# Altium PCB 发送端V04.PcbDoc
Units mm, origin at the board's own origin, x right, y up, seen from the top; angles counter-clockwise.
Board outline 114.55 x 90.3 mm, 2 copper layers (Top Layer, Bottom Layer); 72 components, 37 nets, 403 pads, 42 vias.
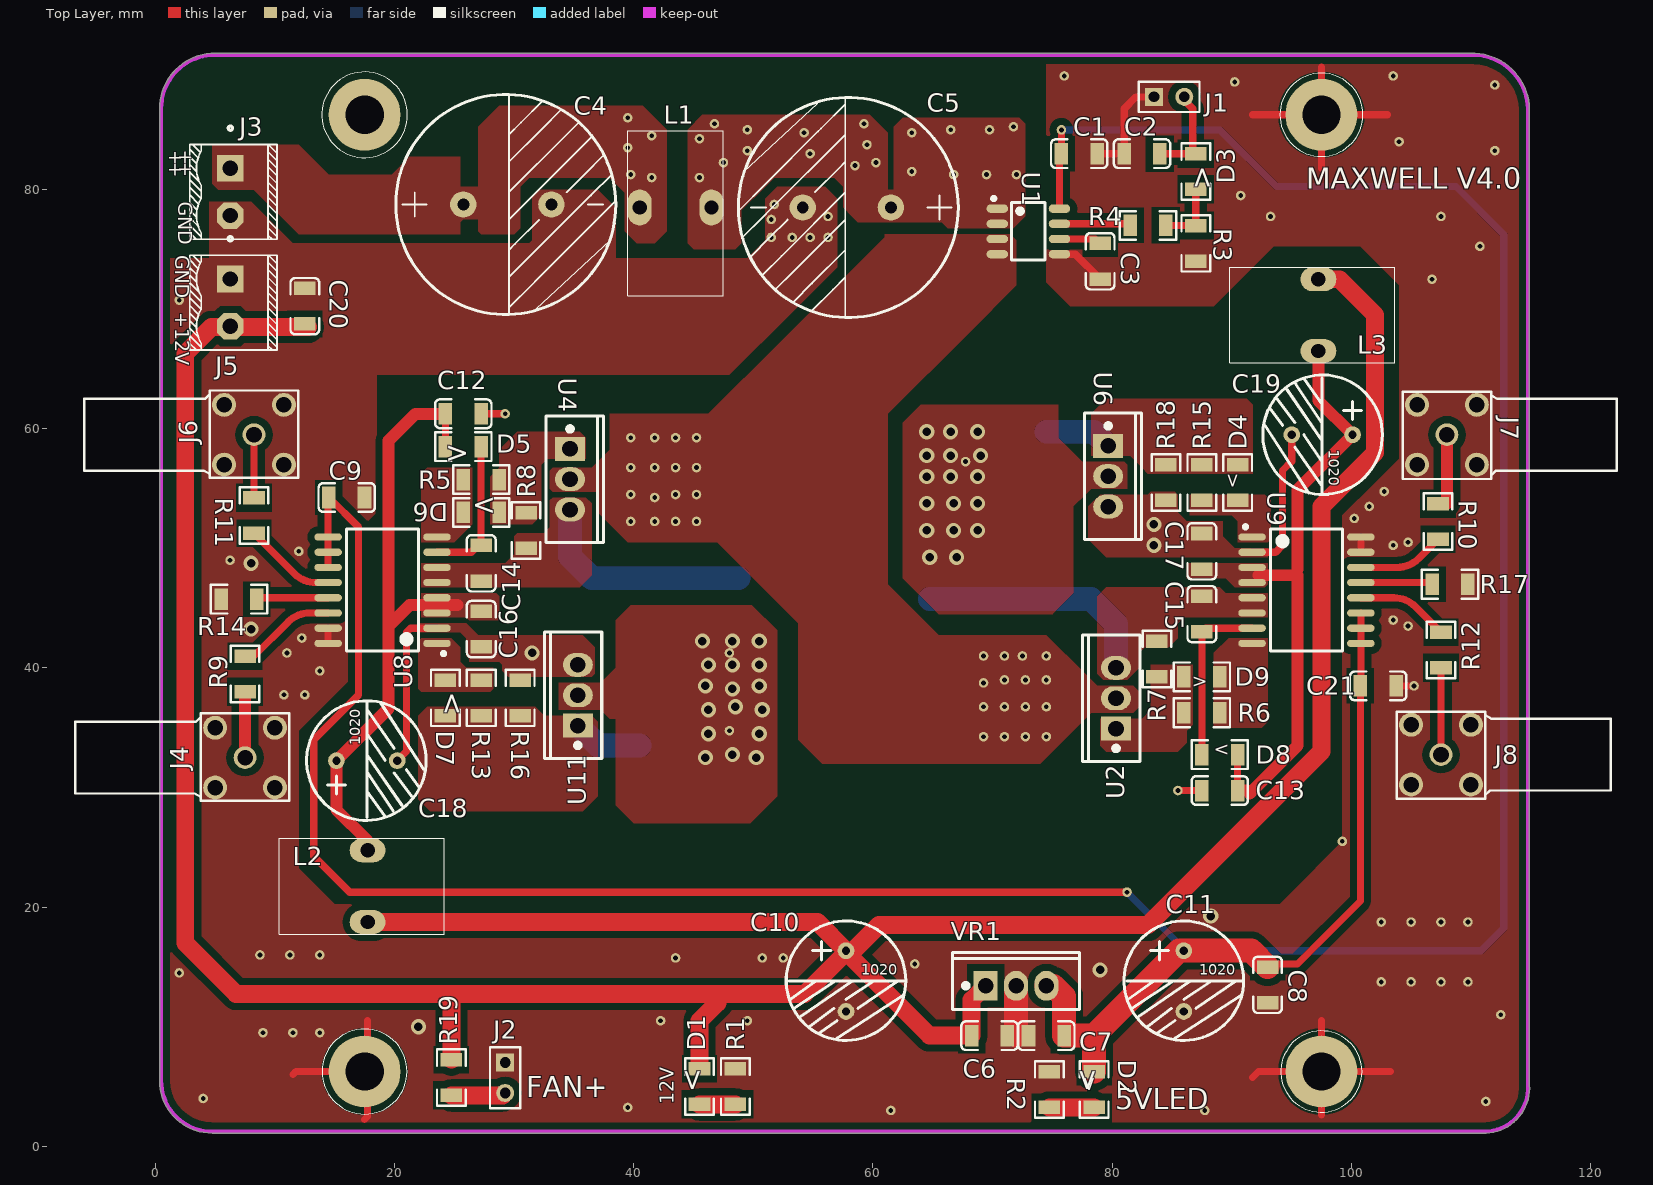
[diagram p0: Top Layer view]
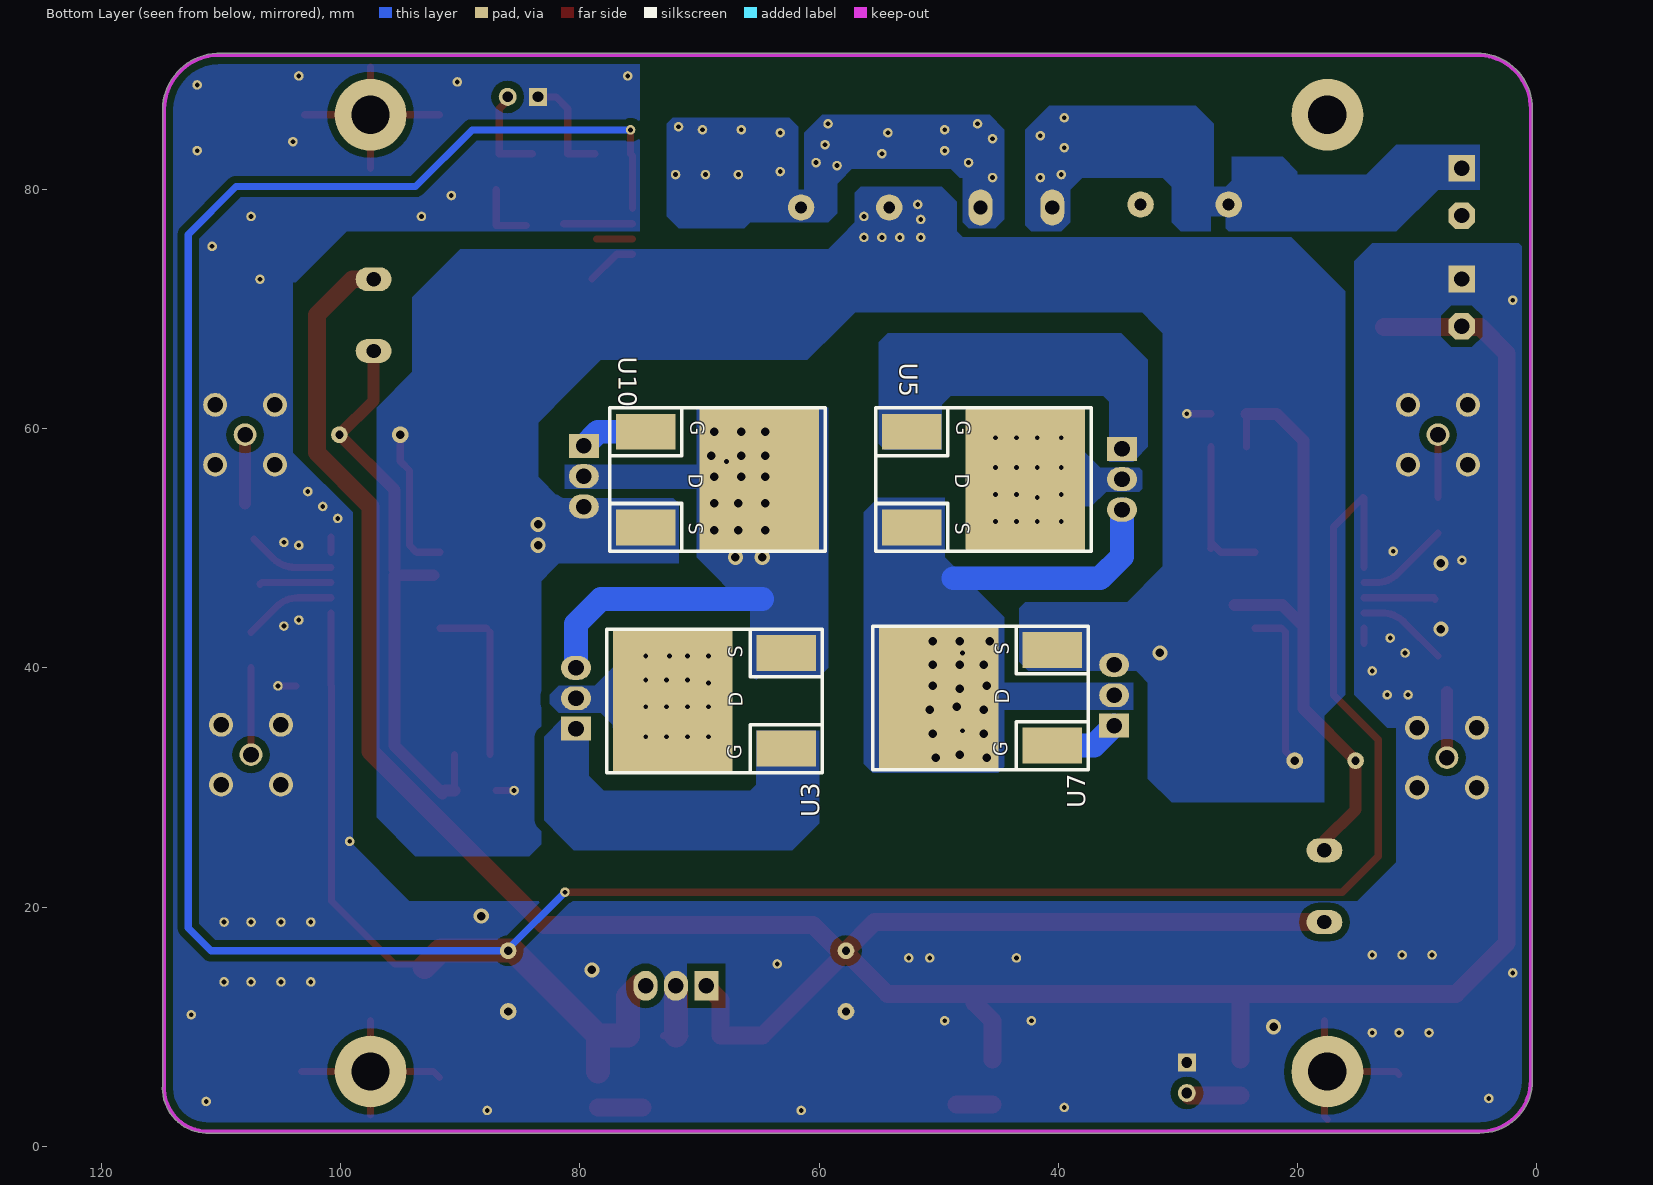
[diagram p1: Bottom Layer view, seen from below]
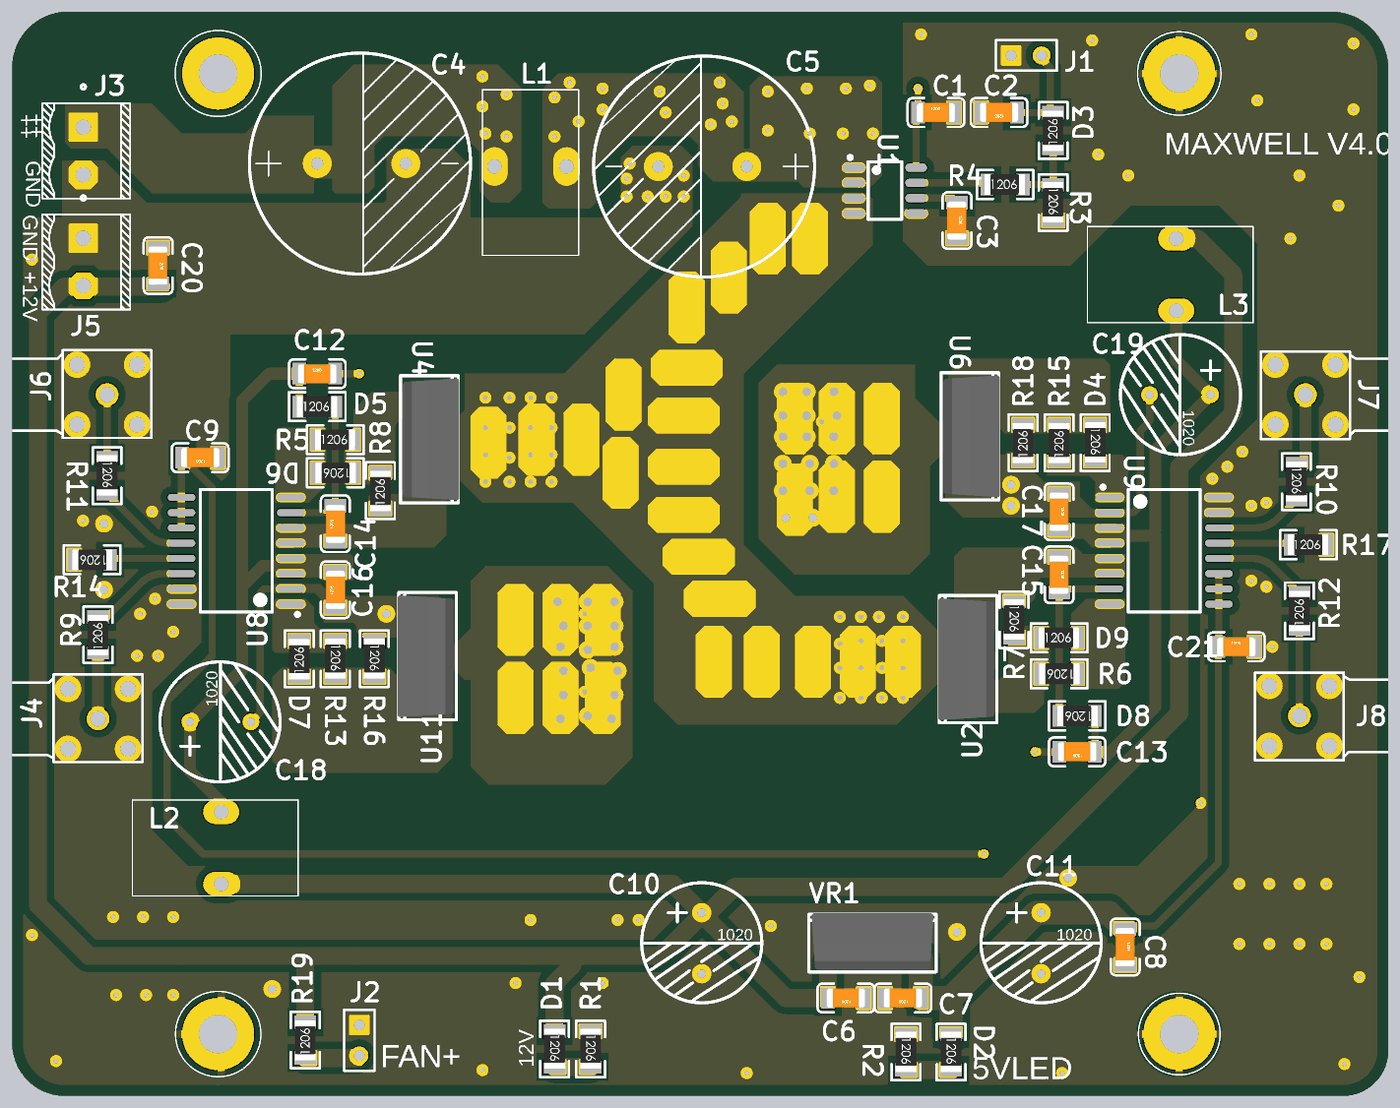
[diagram p2: 3D render of the assembled board from above, using the file's embedded part models]

## Layer stack, top to bottom
Top Solder: solder mask 0.0102, Solder Resist, Dk 3.5
Top Layer: signal copper 0.0356
Dielectric1: dielectric 0.32, FR-4, Dk 4.8
Bottom Layer: signal copper 0.0356
Bottom Solder: solder mask 0.0102, Solder Resist, Dk 3.5

## Board outline
0.35,5.5 ccw(c4.75,5.5) 4.75,1.1 111.25,1.1 ccw(c111.25,1.25) 111.255,1.1 ccw(c111.125,4.875) 114.903,4.875 ccw(c111.125,4.875) 114.9,5.003 114.9,87 ccw(c114.75,87) 114.881,87.074 ccw(c110.125,86.625) 109.998,91.4 5,91.4 ccw(c5,86.75) 0.35,86.75

## Design rules (kind name [scope] priority, off if disabled: settings)
Clearance [All] p1: gap=0.3
ComponentClearance [All] p1: gap=0 collisioncheckmode=3 verticalgap=0 showdistances=FALSE
HoleSize [All] p1 off: absolutevalues=TRUE maxlimit=2.54 minlimit=0.3 maxpercent=80.000 minpercent=20.000
HoleToHoleClearance [All] p1 off: gap=0.254 allowstackedmicrovias=TRUE
LayerPairs [All] p1 off: enforce=TRUE
MinimumSolderMaskSliver [All] p1 off: minsoldermaskwidth=0.254
NetAntennae [All] p1 off: netantennaetolerance=0
PolygonConnect [All] p1: connectstyle=Direct reliefconductorwidth=0.6 reliefentries=4 polygonreliefangle="45 Angle" airgapwidth=0.254
RoutingVias [All] p1: holewidth=0.4 width=0.6 viastyle="Through Hole" minholewidth=0.3 minwidth=0.5 maxholewidth=20 maxwidth=30
SilkToSilkClearance [All] p1 off: silktosilkclearance=0.254
SilkToSolderMaskClearance SilkscreenOverComponentPads [IsPad] p1 off: minsilkscreentomaskgap=0.254 clearancetoexposedcopper=TRUE
SolderMaskExpansion [All] p1: expansion=0.102
Width [All] p1: maxlimit=20 minlimit=0.6 preferedwidth=1
22 further rules are at their usual default settings.

## Components (designator, comment, footprint, x,y, rotation, side; value= is the part's Value field where it differs from the comment)
C1 "01.uF" 1206_C 77.25,83 r0 top
C2 "1nF" 1206_C 82.5,83 r180 top
C3 "1nF" 1206_C 79,74 r270 top
C4 "47uF/160V" C3618 25.75,78.75 r0 top
C5 "47uF/160V" C3618 61.5,78.5 r180 top
C6 "47UF/50" 1206_C 69.75,9.25 r180 top
C7 "10UF/50v" 1206_C 74.5,9.25 r180 top
C8 "10UF/50v" 1206_C 93,13.5 r270 top
C9 "10UF/50v" 1206_C 16,54.25 r180 top
C10 "47UF/50" C1020 57.75,11.25 r90 top
C11 "47UF/50" C1020 86,11.25 r90 top
C12 "10UF" 1206_C 25.75,61.25 r0 top
C13 "10UF" 1206_C 89,29.75 r180 top
C14 "2.2nF" 1206_C 27.25,48.75 r90 top
C15 "2.2nF" 1206_C 87.5,44.5 r270 top
C16 "2.2nF" 1206_C 27.25,43.25 r90 top
C17 "2.2nF" 1206_C 87.5,49.75 r270 top
C18 "47UF/50" C1020 20.25,32.25 r180 top
C19 "47UF/50" C1020 95,59.5 r0 top
C20 "47UF/50" 1206_C 12.5,70.25 r270 top
C21 "10UF/50v" 1206_C 102.25,38.5 r0 top
D1 "LED3" 1206_R 45.5,5 r270 top
D2 "LED3" 1206_R 78.5,4.75 r270 top
D3 "1N5819" 1206_R 87,81.5 r90 top
D4 "1N5819" 1206_R 90.5,55.5 r270 top
D5 "1N5819" 1206_R 25.75,58.5 r0 top
D6 "1N5819" 1206_R 27.25,53 r180 top
D7 "1N5819" 1206_R 24.25,37.5 r90 top
D8 "1N5819" 1206_R 89,32.75 r180 top
D9 "1N5819" 1206_R 87.5,39.25 r0 top
J1 "CON-2" HDR1X2 83.5,87.75 r0 top
J2 "CON-2" HDR1X2 29.25,7 r270 top
J3 "CON-2" F396P2-1 6.5,80 r90 top
J4 "CON-2" GPSPIN 10,30 r180 top
J5 "CON-2" F396P2-1 6.5,70.75 r90 top
J6 "CON-2" GPSPIN 10.75,57 r180 top
J7 "CON-2" GPSPIN 105.5,62 r0 top
J8 "CON-2" GPSPIN 105,35.25 r0 top
L1 "330mH" H3.3 40.5,78.5 r0 top
L2 "330mH" H3.3 17.75,24.75 r270 top
L3 "330mH" H3.3 97.25,72.5 r270 top
R1 "5K" 1206_R 48.5,5 r270 top
R2 "1K" 1206_R 74.75,4.75 r270 top
R3 "10K" 1206_R 87,75.5 r270 top
R4 "2K" 1206_R 83,77 r0 top
R5 "5R" 1206_R 27.25,55.75 r0 top
R6 "5R" 1206_R 87.5,36.25 r180 top
R7 "10K" 1206_R 83.75,40.75 r270 top
R8 "10K" 1206_R 31,51.5 r90 top
R9 "30R" 1206_R 7.5,39.5 r90 top
R10 "30R" 1206_R 107.25,52.25 r270 top
R11 "30R" 1206_R 8.25,52.75 r270 top
R12 "30R" 1206_R 107.5,41.5 r90 top
R13 "5R" 1206_R 27.25,37.5 r270 top
R14 "1K" 1206_R 7,45.75 r180 top
R15 "5R" 1206_R 87.5,55.5 r90 top
R16 "10K" 1206_R 30.5,37.5 r270 top
R17 "1K" 1206_R 108.25,47 r0 top
R18 "10K" 1206_R 84.5,55.5 r90 top
R19 "1K" 1206_R 24.75,5.75 r90 top
U1 "ACS712" SOIC-8_150mil 73,76.5 r270 top
U2 "IKW50N60H3" TO-220 80.25,35 r90 top
U3 "IKW50N60H3" DDPak 72.25,37.25 r90 bottom
U4 "IKW50N60H3" TO-220 34.75,58.25 r270 top
U5 "IKW50N60H3" DDPak 42.75,55.75 r270 bottom
U6 "IRFP4868" TO-220 79.75,58.5 r270 top
U7 "IRFP4868" DDPak 50,37.5 r90 bottom
U8 "IR2110" SOIC-16_300mil 19,46.5 r90 top
U9 "IR2110" SOIC-16_300mil 96.25,46.5 r270 top
U10 "IRFP4868" DDPak 65,55.75 r270 bottom
U11 "IRFP4868" TO-220 35.25,35.25 r90 top
VR1 "L78M05ABDT-TR" TO-220 69.5,13.5 r0 top

## Footprints (in the part's own frame and the unit in brackets; to place one, negate y for a bottom-side part, rotate by r counter-clockwise, add the part's x,y. Pads: shape width x height; smd on the part's side, far side on the other; paste and mask are expansions set on the pad)
1206_C [mm]
  rect 1.13x1.8 smd: 1(-1.49,0) 2(1.49,0)
  silkscreen extent -2.36,-1.2 2.35,1.2, body extent -1.6,-0.81 1.6,0.79, height 1
1206_R [mm]
  rect 1.13x1.8 smd: 1(-1.49,0) 2(1.49,0)
  silkscreen extent -2.36,-1.2 2.35,1.2, body extent -1.7,-0.86 1.65,0.87, height 0.85
C1020 [mm] "1000UF/25V\\470UF/16V"
  round 1.4 hole 0.7: 1(5.106,-0.001) 2(0.026,-0.001)
  silkscreen extent -2.4,-5 7.6,5
C3618 [mm]
  round 2.2 hole 1: 1(0,0) 2(7.366,0)
  silkscreen extent -5.64,-9.2 12.76,9.2
DDPak [mm]
  rect 12x10 smd: D(0,0)
  rect 3x5 smd: G(-4,-9.5) S(4,-9.5)
  silkscreen extent -6,-12.5 6,5.5
F396P2-1 [mil]
  rect 88x88 hole 50: 1(70,9)
  oct 88x88 hole 50: 2(-85.91,9)
  silkscreen extent -164,-145 209,143, body extent -167,-148 151,146, height 559
GPSPIN [mm]
  round 1.9 hole 1.3: 1(2.5,-2.5)
  round 2 hole 1.3: 2(0,0) 2(0,-5) 2(5,0) 2(5,-5)
  silkscreen extent -1.2,-6.2 16.7,1.1
H3.3 [mm]
  oval 2x3 hole 1.2: 1(0,0) 2(6,0)
  silkscreen extent -1,-7.4 7,6.4
HDR1X2 [mm]
  rect 1.5x1.5 hole 0.9: 1(0,0)
  round 1.5 hole 0.9: 2(2.54,0)
  silkscreen extent -1.27,-1.27 3.81,1.27
SOIC-8_150mil [mm]
  oval 0.7x1.8 smd: 1(-1.905,-2.6) 2(-0.635,-2.6) 3(0.635,-2.6) 4(1.905,-2.6) 5(1.905,2.6) 6(0.635,2.6) 7(-0.635,2.6) 8(-1.905,2.6)
  silkscreen extent -2.9,-3.05 2.4,1.4
SOIC-16_300mil [mm]
  oval 0.6x2.3 smd: 1(-4.445,-4.55) 2(-3.175,-4.55) 3(-1.905,-4.55) 4(-0.635,-4.55) 5(0.635,-4.55) 6(1.905,-4.55) 7(3.175,-4.55) 8(4.445,-4.55) 9(4.445,4.55) 10(3.175,4.55) 11(1.905,4.55) 12(0.635,4.55) 13(-0.635,4.55) 14(-1.905,4.55) 15(-3.175,4.55) 16(-4.445,4.55)
  silkscreen extent -5.45,-5.25 5.1,3
TO-220 [mm]
  oval 2x2.5 hole 1.3: D(2.468,-0.077) S(5.008,-0.077)
  rect 2x2.5 hole 1.3: G(-0.072,-0.077)
  silkscreen extent -2.83,-2.08 7.77,2.72, body extent -2.6,-1.88 7.54,2.82, height 19.37

## Part data
C1 C2 C3 C4 C5 C6 C7 C8 C9 C10 C11 C12 C13 C14 C15 C16 C17 C18 C19 C20 C21: library part CAP
D1 D2: "Typical BLUE SiC LED"
D3 D4 D5 D6 D7 D8 D9: library part 1N4148, "1N4148WS IN4148 0805 SOD323 丝印T4 贴片开"
L1 L2 L3: library part INL, "CD75--2.2mH 222M 贴片功率电感绕线功率电感 7*7.8*5mm"
R1 R2 R3 R4 R5 R6 R7 R8 R9 R10 R11 R12 R13 R14 R15 R16 R17 R18 R19: library part RES
U1: library part 6N137S(TA)_[C16496], "贴片?"
U2 U3 U4 U5 U6 U7 U10 U11: library part NMOS
VR1: library part "TO-252-2 L78M05ABDT-TR", "低压差线性稳?"

## Free pads (board coordinates)
  round 6 hole 3.2: 1(17.5,86.25) 2(97.5,86.25) 3(97.5,6.25) 4(17.5,6.25)
  round 0.8 hole 0.4: 5(48,41.25) 6(48,34.75) 7(67.75,57.25) 8(29.25,61.25) 9(85.5,29.75) 11(105.25,38.5) 12(81.25,21.25) 13(75.76,84.99) 14(51.75,78.75) 15(51.5,77.5) 16(51.5,76) 17(53.25,76) 18(54.75,76) 19(56.25,76) 20(56.25,77.75) 21(102.5,18.75) 22(105,18.75) 23(107.5,18.75) 24(109.75,18.75) 25(102.5,13.75) 26(105,13.75) 27(107.5,13.75) 28(109.75,13.75) 29(8.75,16) 30(11.25,16) 31(13.75,16) 32(9,9.5) 33(11.5,9.5) 34(13.75,9.5) 35(52.5,15.75) 36(50.75,15.75) 37(43.5,15.75) 38(42.25,10.5) 39(49.5,10.5) 40(63.5,15.25) 41(2,70.75) 42(10.75,37.75) 43(12.5,37.75) 44(103.5,44) 45(101.5,53.5) 46(102.75,54.75) 47(100.25,52.5) 48(104.75,50.5) 49(104.75,43.5) 50(103.5,50.25) 51(12.25,42.5) 52(12,49.75) 53(11,41.25) 54(6.25,49) 55(13.75,39.75) 56(99.25,25.5) 57(4,4) 58(111.25,3.75) 59(61.5,3) 60(87.75,3) 61(39.5,3.25) 62(2,14.5) 63(112.5,11) 64(112,88.75) 65(76,89.5) 66(112,83.25) 67(103.5,89.5) 68(93.25,77.75) 69(107.5,77.75) 70(110.75,75.25) 71(106.75,72.5) 72(90.75,79.5) 73(104,84) 74(90.25,89) 75(45.5,81) 76(45.5,84.25) 77(46.75,85.5) 78(59.25,85.5) 79(63.25,81.5) 80(63.25,84.75) 81(71.75,85.25) 82(72,81.25) 83(69.5,81.25) 84(66.75,81.25) 85(66.5,85) 86(69.75,85) 87(58.5,82) 88(47.5,82.25) 89(49.5,85) 90(49.5,83.25) 91(54.25,84.75) 92(54.75,83) 93(59.5,83.75) 94(60.25,82.25) 95(39.75,81.25) 96(41.5,81) 97(41.5,84.5) 98(39.5,86) 99(39.5,83.5) 178(69.25,41) 179(71,41) 180(72.5,41) 181(74.5,41) 182(69.25,38.75) 183(71,39) 184(72.75,39) 185(74.5,39) 186(69.25,36.75) 187(71,36.75) 188(72.75,36.75) 189(74.5,36.75) 190(69.25,34.25) 191(71,34.25) 192(72.75,34.25) 193(74.5,34.25) 194(39.75,59.25) 195(41.75,59.25) 196(43.5,59.25) 197(45.25,59.25) 198(39.75,56.75) 199(41.75,56.75) 200(43.5,56.75) 201(45.25,56.75) 202(39.75,54.5) 203(41.75,54.25) 204(43.5,54.5) 205(45.25,54.5) 206(39.75,52.25) 207(41.75,52.25) 208(43.5,52.25) 209(45.25,52.25)
  oct 3x6 on Top Solder: 100(42.25,40.75) 101(46,40.75) 102(42.25,34.25) 103(46,34.25) 104(65.5,57.5) 105(69,57.5) 106(72.75,57.5) 107(65.5,50.75) 108(69,51) 109(72.75,51) 110(49.5,40.75) 111(49.5,34.25) 112(74.5,37.25) 113(70.75,37.25) 114(67,37.25) 115(62.75,37.25) 116(58.75,37.25) 123(40,55.5) 124(44,55.75) 125(47.75,55.75) 126(51.25,59.5) 127(51,53) 131(66.75,72.5) 132(63.25,72.5) 133(60,69.25) 134(56.5,66.75)
  oct 6x3 on Top Solder: 117(59.25,42.5) 118(57.5,46) 119(56.25,49.5) 120(56.25,53.5) 121(56.25,57.75) 122(56.5,61.75)
  oct 3x6 on Bottom Solder: 136(49.5,73) 137(45.5,72.75) 138(41.75,72.75) 139(37.75,72.75) 140(34,73) 141(30.5,72.5) 143(29.5,43.25) 144(26,43.25) 145(21.25,43.25) 146(21.25,50.25) 147(21.5,57.5) 148(21.5,64.5) 149(21.75,72) 150(26.5,72) 151(26.25,64.25) 152(26.25,57.5) 153(26.25,50.25) 155(54,73) 163(82.5,67.5) 164(86.5,67) 166(90.75,67.25) 167(86.5,59.75) 168(91,59.75) 169(86.5,52.25) 170(91.5,52.25) 171(87,44.75) 172(91.75,44.75) 173(87,37.5) 174(91.75,37.75) 176(21,36.5) 177(26,36.5)
  oct 6x3 on Bottom Solder: 142(34.25,43.25) 154(81.25,50.5) 156(59.75,73) 157(63,69.25) 158(67.25,73) 159(70,69.25) 160(74.5,73) 161(77.25,69.25) 162(82.25,73) 165(88.5,72.5) 175(89.25,32)

## Via types
v1: diameter 1.27, hole 0.711, Top Layer to Bottom Layer, 42 vias

## Nets (pads, with @x,y where several pads share a name; then routed paths per layer and width w, separated by ;. In a path a pad name is that pad's centre, name@x,y a point inside that pad or via, vN(x,y) a via of type N, cw(c..) or ccw(c..) an arc to the next point about the centre after c; other vN are vias at no path point)
5V: C1.1 C7.1 C8.1 C9.2 C11.1 C21.1 D2.1 pad.12 pad.13 U1.8 U8.9 U8.10 U8.11 U9.9 U9.10 U9.11 VR1.S | length 309.8
  Top Layer w0.6: U8.11 U8.10 U8.9 C9.2@14.45,54.19 ; C9.2 17,51.76 17,37.75 13.25,34 13.25,24.25 16.25,21.25 pad.12 ; U1.8 C1.1@75.6,82.84 ; C1.1 pad.13 ; C8.1 93.26,15.25 95.5,15.25 100.76,20.51 C21.1 100.8,38.54 U9.9 U9.10 U9.11
  Top Layer w2: VR1.S 75.077,13.423 75.99,12.51 C7.1 78.5,9.25 ; D2.1 78.5,9.25 ; C8.1 91.634,16.356 C11.1 85.606,16.356 78.5,9.25
  Bottom Layer w0.6: pad.13 89.01,84.99 93.75,80.25 108.75,80.25 112.75,76.25 112.75,18.25 110.856,16.356 C11.1 86.001,16.499 pad.12
12V: C6.2 C10.1 C20.2 D1.1 J5.2 L2.2 L3.1 R19.2 VR1.G | length 280
  Top Layer w1.5: C20.2@12.75,68.5 4.703,68.5 2.5,66.297 2.5,17 6.75,12.75 54.296,12.75 57.902,16.356 57.902,16.098 64.75,9.25 C6.2 68.26,12.255 VR1.G ; L2.2@17.5,18.75 55.357,18.75 C10.1 ; R19.2 24.75,12.5 ; 45.5,7.24 45.5,10.5 47,12 ; C10.1@58,16 60.5,18.5 83,18.5 97.5,33 97.5,53.5 102,58 102,69.5 99,72.5 L3.1
48V: C4.1 J3.1 L1.1 pad.95 pad.96 pad.97 pad.98 pad.99
GND2: C1.2 C2.2 C3.2 C4.2 C5.2 C6.1 C7.2 C8.2 C9.1 C10.2 C11.2 C12.2 C13.2 C16.1 C17.1 C18.2 C19.2 C20.1 C21.2 J1.1 J2.1 J3.2 J4.2 J5.1 J6.2 J7.2 J8.2 pad.2 pad.3 pad.4 pad.8 pad.9 pad.11 pad.14 pad.15 pad.16 pad.17 pad.18 pad.19 pad.20 pad.21 pad.22 pad.23 pad.24 pad.25 pad.26 pad.27 pad.28 pad.29 pad.30 pad.31 pad.32 pad.33 pad.34 pad.35 pad.36 pad.37 pad.38 pad.39 pad.40 pad.41 pad.42 pad.43 pad.44 pad.45 pad.46 pad.47 pad.48 pad.49 pad.50 pad.51 pad.52 pad.53 pad.54 pad.55 pad.56 pad.57 pad.58 pad.59 pad.60 pad.61 pad.62 pad.63 pad.64 pad.65 pad.66 pad.67 pad.68 pad.69 pad.70 pad.71 pad.72 pad.73 pad.74 R1.1 R2.1 R3.2 R14.2 R16.1 R17.2 R18.1 U1.5 U6.S U7.S U8.2 U8.15 U8.16 U9.2 U9.15 U9.16 U10.S U11.S VR1.D | length 106.8
  Top Layer w0.6: 11.5,6 11.75,6.25 pad.4 pad.4@17.75,6.25 ; U8.16 U8.15 ; 17.5,2.25 17.75,2.5 pad.4@17.75,6.25 ; 17.75,10.5 pad.4@17.75,6.25 ; C18.2 21,33.027 21,43 21.325,43.325 U8.2 ; C12.2 pad.8 ; C6.1 C7.2 ; U1.5 76.915,74.595 C3.2 ; C1.2 C2.2 81.01,86.76 82,87.75 J1.1 ; pad.9 C13.2@87.01,29.75 ; U9.2 93.675,49.675 94.25,50.25 94.25,56.5 95.026,57.276 C19.2 ; 91.75,5.75 92.25,6.25 pad.3 ; 91.75,86.25 pad.2 ; 97.5,2.639 pad.3 ; 97.5,10.5 pad.3 ; 97.5,81.75 pad.2 ; 97.5,90.25 pad.2 ; U9.15 U9.16 ; 103,86.25 pad.2 ; 103.25,6.25 pad.3 ; C21.2 pad.11
  Top Layer w2: 71.968,9.25 VR1.D
  other v1: 22,10 79,14.75 88.25,19.25 31.5,41.25 8,43.25 8,48.75 83.5,50.25 83.5,52
NetC2_1: C2.1 D3.2 J1.2 | length 7.8
  Top Layer w0.6: C2.1 84,82.99 86.75,82.99 86.75,86.75 86.04,87.46 J1.2
NetC3_1: C3.1 U1.6 | length 3
  Top Layer w0.6: U1.6 C3.1@78.625,75.865
NetC5_1: C5.1 L1.2 pad.75 pad.76 pad.77 pad.78 pad.79 pad.80 pad.81 pad.82 pad.83 pad.84 pad.85 pad.86 pad.87 pad.88 pad.89 pad.90 pad.91 pad.92 pad.93 pad.94 U1.1 U1.2
NetC12_1: C12.1 C16.2 C18.1 D5.1 L2.1 U8.3 U8.4 | length 52.3
  Top Layer w0.6: D5.1 C12.1
  Top Layer w1: L2.1@17.75,24.5 17.75,25.55 15.144,28.156 C18.1 19.5,36.607 19.5,43.5 ; C12.1 21.75,61.25 19.5,59 19.5,43.5 ; 25.25,45.25 21.25,45.25 19.5,43.5
NetC13_1: C13.1 C17.2 C19.1 D8.1 L3.2 U9.3 U9.4 | length 48.4
  Top Layer w0.6: D8.1 90.49,30.02 C13.1@90.76,29.75
  Top Layer w1: C13.1 91.25,29.75 ; 91.5,29.5 95.5,33.5 95.5,47.75 92.25,47.75 ; 95.5,48.25 95.5,54.893 C19.1 97.25,62.355 L3.2
NetC14_1: C14.1 pad.5 pad.6 R8.1 U4.S U5.S U7.D U8.5 U8.6 U11.D | length 18.7
  Bottom Layer w2: U4.S 34.673,49.327 36.5,47.5 48.75,47.5
  other v1: 46,32.5 50.25,32.5 48.25,32.75 46.25,34.5 50.5,34.5 46.25,36.5 50.75,36.5 48.5,36.75 48.25,38.25 46,38.5 50.5,38.5 46.25,40.25 48.25,40.25 50.5,40.25 45.75,42.25 48.25,42.25 50.5,42.25
NetC14_2: C14.2 D5.2 U8.7 | length 12.5
  Top Layer w0.6: U8.7 26.415,49.675 C14.2@27.24,50.5 ; D5.2 C14.2@27.24,50.5 ; C14.2@27.25,49.99 27.24,50 C14.2@27.24,50.5
NetC15_1: C15.1 pad.7 R7.1 U2.S U3.S U6.D U9.5 U9.6 U10.D | length 20.1
  Bottom Layer w2: 64.75,45.75 78.25,45.75 80.327,43.673 U2.S
  other v1: 64.75,49.25 67,49.25 64.5,51.5 66.75,51.5 68.75,51.5 64.5,53.75 66.75,53.75 68.75,53.75 64.5,56 66.5,56 68.75,56 64.5,57.75 66.5,57.75 69,57.75 64.5,59.75 66.5,59.75 68.75,59.75
NetC15_2: C15.2 D8.2 U9.7 | length 14.1
  Top Layer w0.6: D8.2 C15.2@87.51,43 ; C15.2@87.815,43.325 U9.7
NetD1_2: D1.2 R1.2 | length 3
  Top Layer w1.5: D1.2 R1.2
NetD2_2: D2.2 R2.2 | length 3.8
  Top Layer w1.5: R2.2 D2.2
NetD3_1: D3.1 R3.1 R4.2 | length 5.5
  Top Layer w0.6: R4.2 86.99,77 R3.1 D3.1
NetD4_1: D4.1 R15.2 R18.2 U6.G U10.G | length 5.7
  Bottom Layer w2: U10.G 78.495,59.75 U6.G
NetD4_2: D4.2 R15.1 U9.1
NetD6_1: D6.1 R5.2 R8.2 U4.G U5.G
NetD6_2: D6.2 R5.1 U8.8
NetD7_1: D7.1 R13.2 R16.2 U7.G U11.G | length 5.9
  Bottom Layer w2: U11.G 37.005,33.5 U7.G
NetD7_2: D7.2 R13.1 U8.1
NetD9_1: D9.1 R6.2 R7.2 U2.G U3.G
NetD9_2: D9.2 R6.1 U9.8
NetJ2_2: J2.2 R19.1 | length 4.3
  Top Layer w1.5: R19.1 J2.2@29.05,4.26
NetJ4_1: J4.1 R9.1 | length 5.5
  Top Layer w1: J4.1 R9.1
NetJ6_1: J6.1 R11.1 | length 5.3
  Top Layer w0.6: R11.1 J6.1
NetJ7_1: J7.1 R10.1 | length 5.8
  Top Layer w1: R10.1@108,53.75 J7.1
NetJ8_1: J8.1 R12.1 | length 7.3
  Top Layer w0.6: J8.1 R12.1
NetR4_1: R4.1 U1.7 | length 5.8
  Top Layer w0.6: U1.7 R4.1@81.375,77.135
NetR9_2: R9.2 U8.14 | length 7.6
  Top Layer w0.6: R9.2@8.25,40.99 11.111,43.851 cw(c12.907,42.055) 12.907,44.595 U8.14
NetR10_2: R10.2 U9.14 | length 7.3
  Top Layer w0.6: U9.14 103.843,48.405 ccw(c103.843,50.945) 105.639,49.149 R10.2
NetR11_2: R11.2 U8.12 | length 7.8
  Top Layer w0.6: R11.2 11.631,47.879 ccw(c13.427,49.675) 13.427,47.135 U8.12
NetR12_2: R12.2 U9.12 | length 7.8
  Top Layer w0.6: U9.12 103.573,45.865 cw(c103.573,43.325) 105.369,45.121 R12.2
NetR14_1: R14.1 U8.13 | length 6
  Top Layer w0.6: R14.1 8.605,45.865 U8.13
NetR17_1: R17.1 U9.13 | length 6
  Top Layer w0.6: U9.13 106.625,47.135 R17.1
NetU1_3: pad.178 pad.179 pad.180 pad.181 pad.182 pad.183 pad.184 pad.185 pad.186 pad.187 pad.188 pad.189 pad.190 pad.191 pad.192 pad.193 pad.194 pad.195 pad.196 pad.197 pad.198 pad.199 pad.200 pad.201 pad.202 pad.203 pad.204 pad.205 pad.206 pad.207 pad.208 pad.209 U1.3 U1.4 U2.D U3.D U4.D U5.D

## Polygon pours and split planes (outlines as drawn)
NetC14_1 on Bottom Layer "Top Layer-No Net" (solid, remove dead copper, pour order 23): 49.5,54.25 55.25,54.25 55.25,54 55.75,53.5 56.25,53 56.25,32.5 56.25,32 55.5,31.25 45.75,31.25 45,31.25 44.5,31.75 44.5,43 44.5,44.25 45,44.75 49.5,49.25 49.5,50 49.5,54.25
NetC15_1 on Bottom Layer "Top Layer-No Net" (solid, remove dead copper, pour order 25): 59.25,61.75 70.25,61.75 70.25,49.25 66,45 65.75,44.75 65.75,39.75 65.75,39.5 65.25,39 65,39.25 60.25,39.25 60,39.25 59.25,40 59.25,61.75
NetC15_1 on Bottom Layer "Top Layer-No Net" (solid, remove dead copper, pour order 27): 81.25,57 70,57 70,54.75 70.25,55 81.25,55 81.25,57
NetC14_1 on Bottom Layer "Top Layer-No Net" (solid, remove dead copper, pour order 29): 33.75,38.75 45.5,38.75 45.5,36.75 45.25,36.5 33.75,36.5 33.75,38.75
NetU1_3 on Bottom Layer "Top Layer-No Net" (solid, remove dead copper, pour order 33): 81.75,38.5 79,38.5 78.75,38.5 77.25,40 75.25,40 75.25,36 76.25,35 77.25,35 77.25,35.25 78.25,36.25 81.75,36.25 82.5,37 82.5,37.75 81.75,38.5
NetU1_3 on Bottom Layer "Top Layer-No Net" (solid, remove dead copper, pour order 35): 33,56.5 33.25,56.75 36.5,56.75 38.5,58.75 39.5,58.75 39.75,58.5 40,58.25 40,54 39.75,54 39.5,53.75 39.25,53.5 37.75,53.5 37.25,53.5 36,54.75 33.25,54.75 33,55 33,56.5
NetD9_1 on Bottom Layer "Top Layer-No Net" (solid, remove dead copper, pour order 80): 65.25,34.75 65.25,30.25 65.75,29.75 78,29.75 79.25,31 79.25,35.75 81.5,35.75 83,34.25 83,27.5 83,27.25 81.5,25.75 80.5,24.75 64.25,24.75 62.25,24.75 60.25,26.75 60,27 60,34.75 65.25,34.75
GND2 on Bottom Layer "Top Layer-No Net" (solid, remove dead copper, pour order 94): 51.75,80.25 56,80.25 56.5,80.25 56.75,80 57,79.75 57,77.5 57,77.25 58.25,76 59.25,75 79.25,75 90,75 93.25,71.75 94,71 94,65.75 94,64.75 97,61.75 97,32.75 97,27.5 93.75,24.25 84.5,24.25 84.25,24.25 83.5,25 83.25,25.25 83.25,47.25 82.25,48.25 81.75,48.75 71.75,48.75 71.75,53.75 72.25,54.25 72.5,54.5 81,54.5 82,54.5 83.25,55.75 83.5,56 83.5,60 83.5,60.5 80.75,63.25 78.25,65.75 63,65.75 61,65.75 58.25,68.5 51.75,75 51.75,75.25 51.75,80.25
NetD6_1 on Bottom Layer "Top Layer-No Net" (solid, remove dead copper, pour order 98): 35.75,57.25 33.75,57.25 33.5,57.5 32.5,58.5 32.5,61.75 32.5,65.75 34.5,67.75 34.75,68 53.75,68 54.25,68 55,67.25 55,58.75 54.5,58.25 49.75,58.25 49.75,62 49,62.75 36.75,62.75 36.25,62.75 35.75,62.25 35.75,57.25
GND2 on Bottom Layer "Top Layer-No Net" (solid, remove dead copper, pour order 100): 56.5,80.25 50.75,80.25 49.75,80.25 48.5,79 48.5,76.5 48,76 34,76 20.5,76 16.25,71.75 16,71.5 16,66.75 16,37.75 17,36.75 17.75,36 17.75,28.75 30.5,28.75 32.5,30.75 32.5,38.5 32.5,38.75 33.25,39.5 33.5,39.75 42.25,39.75 42.5,39.75 43.25,40.5 43.25,45 42.75,45.5 34.25,45.5 31.5,48.25 31.25,48.5 31.25,67.75 31.25,68 32,68.75 33,69.75 57,69.75 57,72.75 57.25,73 57,73.25 57,79.75 56.5,80.25
GND2 on Bottom Layer "Top Layer-No Net" (solid, remove dead copper, pour order 114): 0.5,74.5 1.5,75.5 13.5,75.5 13.75,75.5 15,74.25 15.25,74 15.25,58.75 15.25,37.75 12.5,35 11.75,35 11.75,23.75 12.5,23 15,20.5 94,20.5 94.25,20.5 99.25,25.5 99,25.75 99,52.75 99,53 103.75,57.75 104,58 104,72.25 103.75,72.25 99.75,76.25 99.5,76.5 75,76.5 75,91.25 114.75,91.25 114.75,1.5 115,1.25 0.5,1.25 0.5,74.5
48V on Bottom Layer "Top Layer-No Net" (solid, remove dead copper, pour order 116): 4.75,80.5 4.75,83.75 11.75,83.75 14.25,81.25 20,81.25 20,81.5 21.25,82.75 25.5,82.75 25.5,80.75 25.75,80.5 26,80.25 27,80.25 27,85.5 28.5,87 28.75,87 40.75,87 42.75,85 42.75,77 42.25,76.5 40,76.5 39.75,76.5 39.5,76.75 39,77.25 39,80 38,81 31.25,81 30.5,80.25 30.5,77.25 29.75,76.5 27.25,76.5 27.25,77.75 26,77.75 26,76.75 25.75,76.5 12.25,76.5 11.75,76.5 8.25,80 4.75,80 4.75,80.5
NetC5_1 on Bottom Layer "Top Layer-No Net" (solid, remove dead copper, pour order 118): 46.5,76.75 47.5,76.75 47.75,77 48,77.25 48,81 48.25,81 48.75,81.5 49,81.75 57,81.75 57.25,81.75 58.25,80.75 58.5,80.5 58.5,78.25 58.5,78 59.25,77.25 65.75,77.25 66.25,76.75 71.75,76.75 72.75,77.75 72.75,85.5 72.25,86 62.5,86 61.75,85.25 61.75,80 61.25,80 61.25,84.75 59.75,86.25 45.75,86.25 44.5,85 44.5,77.5 45.25,76.75 46.5,76.75
NetU1_3 on Top Layer "Top Layer-No Net" (solid, remove dead copper, pour order 31): 69,76.25 71.25,76.25 71.5,76.25 72,75.75 72,72 68,68 61.25,61.25 61.25,49.25 61.25,47 65.25,43 65.5,42.75 74.5,42.75 77.75,39.5 78.75,38.5 81.5,38.5 81.75,38.5 82,38.25 82.25,38 82.25,37.25 82.25,36.75 82,36.5 81.75,36.25 78.75,36.25 78.25,36.25 75.25,33.25 74,32 56,32 55.75,32 54.75,33 53.75,34 53.75,43.75 47,50.5 39.5,50.5 37.75,52.25 37,53 37,54.75 33.25,54.75 33,55 33,56.25 33,56.5 33.25,56.75 36.5,56.75 38,58.25 38,61.25 46.25,61.25 52.25,67.25 61,76 61,76.25 71.5,76.25
NetC15_1 on Top Layer "Top Layer-No Net" (solid, remove dead copper, pour order 41): 81.25,57 81,57.25 77.75,57.25 77.5,57.25 76.25,58.5 75.5,59.25 75.5,62 64,62 62.5,60.5 62.5,47.5 65.5,44.5 75.037,44.5 75.037,44.537 76.5,46 76.75,46.25 76.75,53.25 76.75,53.5 77.75,54.5 78.25,55 81.25,55 81.25,57
NetC14_1 on Top Layer "Top Layer-No Net" (solid, remove dead copper, pour order 43): 33.75,38.75 37.25,38.75 38.25,39.75 38.5,40 38.5,43 38.5,44 39.5,45 39.75,45.25 49.31,45.25 49.885,45.25 52,43.135 52,29.5 52,29.25 49.75,27 41.25,27 40,27 38.75,28.25 38.5,28.5 38.5,35.75 38,35.75 37.25,36.5 33.75,36.5 33.75,38.75
NetD6_2 on Top Layer "Top Layer-No Net" (solid, remove dead copper, pour order 45): 22.25,50.5 24.5,50.5 25,50.5 26.25,51.75 26.5,52 26.5,56.75 22.75,56.75 22.25,56.25 22.25,50.5
NetD6_1 on Top Layer "Top Layer-No Net" (solid, remove dead copper, pour order 47): 28,52 31.5,52 32,52.5 32.25,52.75 32.25,57 32.75,57.5 36,57.5 36,59.25 35.5,59.75 30.5,59.75 30.25,59.75 29,58.5 28.75,58.25 28.75,57 28.75,56.75 28.25,56.25 28,56 28,52
NetC14_1 on Top Layer "Top Layer-No Net" (solid, remove dead copper, pour order 49): 22.25,48.75 29.25,48.75 30,49.5 30,51 30.25,51.25 32.5,51.25 33,51.75 33,54 33.25,54.25 35.75,54.25 36,54.25 36.5,53.75 36.5,48 36.5,47.75 35.5,46.75 22.25,46.75 22.25,48.75
NetD7_2 on Top Layer "Top Layer-No Net" (solid, remove dead copper, pour order 51): 22.25,42.5 24.75,42.5 25.25,42 25.5,41.75 25.5,40.5 26,40 28.25,40 28.25,38.25 28,38 22.5,38 22.25,38 22,38.25 22,42.25 22.25,42.5
GND2 on Top Layer "Top Layer-No Net" (solid, remove dead copper, pour order 55): 22.25,43.75 25,43.75 26,43.75 26.25,43.5 27,42.75 28.25,42.75 35.75,42.75 36.75,41.75 36.75,39.5 36.5,39.25 32.75,39.25 29.5,39.25 29,39.75 29,40.25 28.75,40.5 26.25,40.5 26.25,40.75 26,41 26,42 26,42.5 25.5,43 22,43 22,43.75 22.25,43.75
NetC12_1 on Top Layer "Top Layer-No Net" (solid, remove dead copper, pour order 57): 22.25,46.25 28.5,46.25 28.75,46 28.75,45.5 28.75,44 26.25,44 26,44.25 22.25,44.25 22.25,46.25
NetD9_1 on Top Layer "Top Layer-No Net" (solid, remove dead copper, pour order 59): 86.75,40.25 83.25,40.25 83.25,36.5 82.5,35.75 79,35.75 79,33.5 79.5,33 85.5,33 85.75,33.25 86.25,33.75 86.25,34.5 86.25,34.75 86.75,35.25 86.75,40.25
NetC15_1 on Top Layer "Top Layer-No Net" (solid, remove dead copper, pour order 61): 93,44.25 93,46.25 90.25,46.25 89.5,46.25 89,46.75 81.5,46.75 79.5,46.75 78.75,46 78.75,39.5 79.25,39 81,39 81.25,39 81.75,39.5 82.25,40 82.25,41.25 82.5,41.5 82.75,41.75 84.75,41.75 85,42 85.5,42.5 85.5,43.75 86,44.25 93,44.25
NetD9_2 on Top Layer "Top Layer-No Net" (solid, remove dead copper, pour order 63): 93,42.5 93,36 93,35.5 92.5,35 88.5,35 88.5,41.25 89.75,42.5 93,42.5
NetC13_1 on Top Layer "Top Layer-No Net" (solid, remove dead copper, pour order 65): 93,47 93,48.75 86.25,48.75 86.25,47.5 89.5,47.5 90.25,46.75 92.75,46.75 93,47
NetD4_2 on Top Layer "Top Layer-No Net" (solid, remove dead copper, pour order 69): 86.5,54.5 92.75,54.5 93.25,54 93.25,50.75 93,50.5 90.5,50.5 90.5,52.25 90,52.75 86.5,52.75 86.5,54.5
GND2 on Top Layer "Top Layer-No Net" (solid, remove dead copper, pour order 71): 93,50 90.25,50 89.5,50.75 89.25,51 89.25,52.25 86.25,52.25 85.5,53 85.5,54.5 85.25,54.75 83.5,54.75 83.25,54.75 83,54.5 79,54.5 78,53.5 78,50.75 79.25,49.5 79.5,49.25 93,49.25 93,50
NetD4_1 on Top Layer "Top Layer-No Net" (solid, remove dead copper, pour order 73): 91.75,56.25 83,56.25 82.5,56.75 81.5,57.75 78.25,57.75 78.25,61.25 78.75,61.75 79.5,62.5 91,62.5 91.25,62.5 91.75,62 91.75,56.25
NetD7_1 on Top Layer "Top Layer-No Net" (solid, remove dead copper, pour order 76): 22,36 22.75,36.75 31.5,36.75 31.75,36.75 32.5,36 36.5,36 37,35.5 37,29.75 37,29.25 36,28.25 35.75,28 25.25,28 23,28 22,29 22,36
NetC5_1 on Top Layer "Top Layer-No Net" (solid, remove dead copper, pour order 88): 48.5,75 45,75 44.5,75.5 44.5,81.75 44.5,85 45.75,86.25 58.75,86.25 59.75,86.25 60.25,85.75 61.25,84.75 61.25,80 61.75,80 61.75,84.75 61.75,85.25 62.5,86 72,86 72.25,86 72.75,85.5 72.75,79 72.75,77.75 71.75,76.75 66.25,76.75 65.75,77.25 59,77.25 58.75,77.25 58.25,77.75 57.5,78.5 57.5,80 57.5,80.25 56.75,81 52,81 51.75,81 51,80.25 49,78.25 49,75.75 49,75.5 48.5,75
48V on Top Layer "Top Layer-No Net" (solid, remove dead copper, pour order 106): 41.75,75.5 42.75,76.5 42.75,79 42.75,85 41.5,86.25 40.75,87 28.75,87 28,86.25 27,85.25 27,80.25 25.5,80.25 25.5,82.75 21.25,82.75 19.75,81.25 15,81.25 14.5,81.25 12,83.75 4.75,83.75 4.75,80.5 5,80.25 5.25,80 8.25,80 10.75,77.5 12,76.25 25.5,76.25 25.5,77.25 25.75,77.5 27,77.5 27,76.5 27.25,76.25 29.25,76.25 30,76.25 30.25,76.5 30.5,76.75 30.5,80 30.5,80.25 31.25,81 37.75,81 38,81 39,80 39.25,79.75 39.25,76.5 40.25,75.5 41.75,75.5
GND2 on Top Layer "Top Layer-No Net" (solid, remove dead copper, pour order 108): 4.5,79 8,79 11.5,75.5 12,75.5 31.25,75.5 31.5,75.75 31.5,79 31.5,79.5 32,80 36.75,80 37,80 38,79 38.5,78.5 38.5,74.25 49.5,74.25 50,74.75 51,75.75 51,79 51,79.25 52,80.25 56,80.25 56.75,79.5 57,79.25 57,75.25 57,73.5 53.25,69.75 48,64.5 19.25,64.5 18.5,64.5 17.75,65.25 17,66 17,68.75 17,69.25 15.75,70.5 15.25,71 4.5,71 4.5,79
GND2 on Top Layer "Top Layer-No Net" (solid, remove dead copper, pour order 110): 0.5,74.25 15.25,74.25 16.25,74.25 18,72.5 18.5,72 18.5,53 16.5,51 16.5,42 16.5,39.25 12.75,35.5 12,34.75 12,23.75 12,23.25 14.75,20.5 15,20.25 42,20.25 94,20.25 94.75,21 99.25,25.5 99.25,51.75 99.25,52.75 102,55.5 104,57.5 104,72 103.75,72.25 100.75,75.25 100,75.25 93.5,75.25 92.75,74.5 90.25,72 88.5,70.25 77.75,70.25 76.5,70.25 74.75,72 74.5,72.25 74.5,91.25 114.75,91.25 114.75,1.25 0.5,1.25 0.25,1 0.5,1.25 0.5,74.25

## Keep-outs
Keep-Out Layer:
  lines w0.3: 100,91.25 110.25,91.25 ; 100.25,1.25 111.25,1.25 ccw(c111.125,4.875) 114.75,5 114.75,87 ; 100.5,1.25 15,1.25 4.75,1.25 cw(c4.75,5.5) 0.5,5.5 0.5,86.75 cw(c5,86.75) 5,91.25 15,91.25 100.5,91.25 ; 110,91.25 cw(c110.125,86.625) 114.75,86.75

## Silkscreen, mask and mechanical layers (free items; w line width, h text height)
Top Overlay:
  circle w0.1: c17.5,86.25 r3.579
  circle w0.1: c97.5,86.25 r3.473
  circle w0.1: c97.5,6.25 r3.4
  circle w0.1: c17.5,6.25 r3.553
  text "<" at 86.25,82 h3 r270
  text "+" at 1.834,81.795 h2
  text "+" at 1,81.75 h2
  text "+" at 1.834,80.795 h2
  text "+" at 1,80.75 h2
  text "MAXWELL V4.0" at 96.25,79.5 h3
  text "GND" at 1.5,79 h2 r270
  text "GND" at 1.25,74.5 h2 r270
  text "+12V" at 1.25,69.75 h2 r270
  text "<" at 26.25,59.25 h3 r180
  text "<" at 91,55 h2 r90
  text "<" at 26.5,52.25 h3
  text "<" at 88,39.75 h2 r180
  text "<" at 23.5,38 h3 r270
  text "<" at 88.5,32.25 h2
  text "<" at 46.25,4.5 h3 r90
  text "<" at 79,4.5 h2 r90
  text "<" at 79.25,4.5 h3 r90
  text "FAN+" at 31,3.5 h3
  text "12V" at 43.75,3.5 h2 r90
  text "5VLED" at 80.25,2.5 h3

## Text inside footprints (layer, text, board x,y; h text height)
C10: Top Overlay "1020" at 59.021,14.07 h1.52
C11: Top Overlay "1020" at 87.271,14.07 h1.52
C18: Top Overlay "1020" at 17.43,33.521 h1.52 r90
C19: Top Overlay "1020" at 97.82,58.229 h1.52 r270
U3: Bottom Overlay "S" at 65.95,40.85 h2 r270; Bottom Overlay "G" at 66.05,32.35 h2 r270; Bottom Overlay "D" at 65.95,36.75 h2 r270
U5: Bottom Overlay "S" at 49.05,52.15 h2 r90; Bottom Overlay "G" at 48.95,60.65 h2 r90; Bottom Overlay "D" at 49.05,56.25 h2 r90
U7: Bottom Overlay "S" at 43.7,41.1 h2 r270; Bottom Overlay "G" at 43.8,32.6 h2 r270; Bottom Overlay "D" at 43.7,37 h2 r270
U10: Bottom Overlay "S" at 71.3,52.15 h2 r90; Bottom Overlay "G" at 71.2,60.65 h2 r90; Bottom Overlay "D" at 71.3,56.25 h2 r90